# EAGLE board Solar USB (EAGLE 7.1.0)
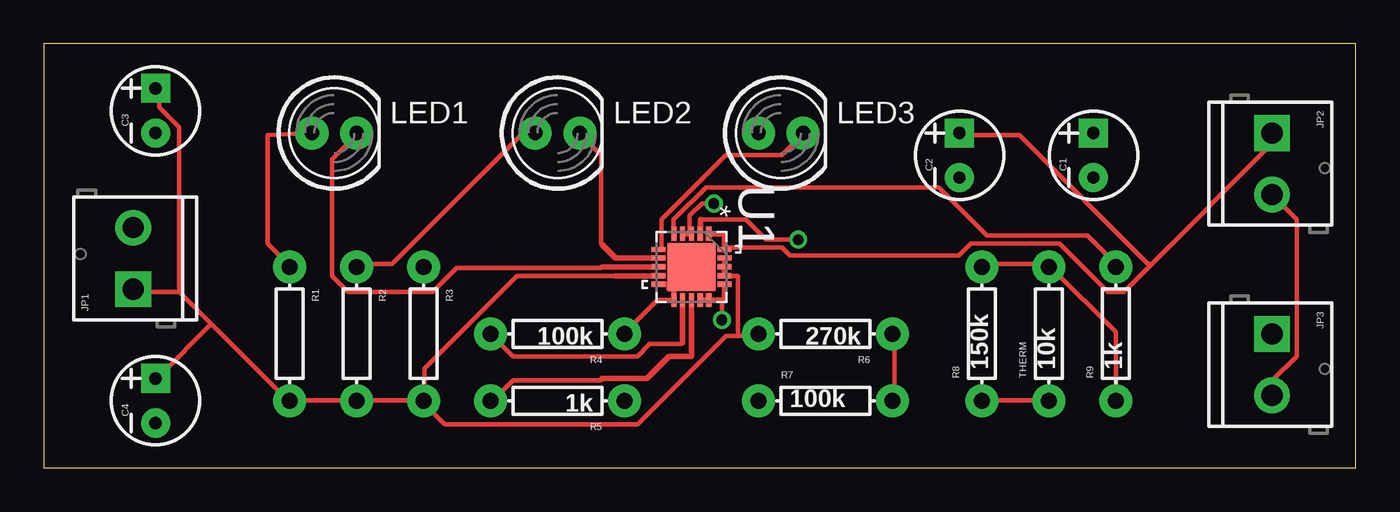
[diagram p0: board, top side]
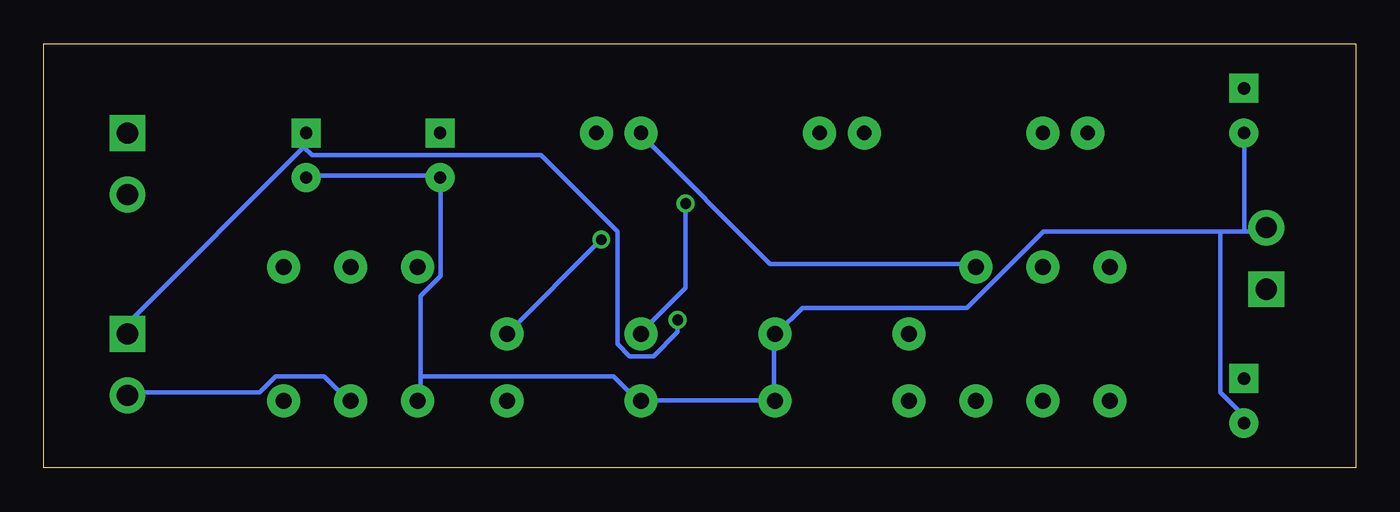
[diagram p1: board, bottom side, seen from below]

Size 74.6 x 24.12 mm. Coordinates in mm from the lower left corner, seen from the top.
Outline: 0,0 74.6,0 74.6,24.12 0,24.12 0,0
Copper layers (1*16): Top 0.035mm / dielectric 1.5mm / Bottom 0.035mm
Design rules "default": minimum track width 10mil, minimum drill 24mil, track to track 8mil, track to pad 8mil, pad to pad 8mil, via to via 8mil, smd to smd 8mil, copper to edge 40mil, drill to drill 8mil, minimum pad ring 10mil, minimum via ring 8mil, stop-mask expansion 4mil, vias tented up to drill 0mil, thermal gap 10mil

## Footprints (pad centres in the part's own frame; a part is rotated, then mirrored left to right if it is on the bottom)
CPOL-RADIAL-10UF-25V-KIT = drill 0.7 pad 1.651 square: 1 1.27,0 | drill 0.7 pad 1.651: 2 -1.27,0
SCREWTERMINAL-3.5MM-2 = drill 1.2 pad 2.032 square: 1 0,0 | drill 1.2 pad 2.032: 2 3.5,0
LED5MM = drill 0.813 pad 1.88: A -1.27,0; K 1.27,0
AXIAL-0.3 = drill 0.9 pad 1.88: P$1 -3.81,0; P$2 3.81,0
QFN50P400X400X100-21N = smd 0.813 x 0.305: 1 -1.88,0.991; 2 -1.88,0.508; 3 -1.88,0; 4 -1.88,-0.508; 5 -1.88,-0.991; 11 1.88,-0.991; 12 1.88,-0.508; 13 1.88,0; 14 1.88,0.508; 15 1.88,0.991 | smd 0.305 x 0.813: 6 -0.991,-1.88; 7 -0.508,-1.88; 8 0,-1.88; 9 0.508,-1.88; 10 0.991,-1.88; 16 0.991,1.88; 17 0.508,1.88; 18 0,1.88; 19 -0.508,1.88; 20 -0.991,1.88 | smd 2.743 x 2.743: 21 0,0

## Placement (x,y rotation side)
C1  10uF  [CPOL-RADIAL-10UF-25V-KIT]  59.69,17.78 90 top
C2  10uF  [CPOL-RADIAL-10UF-25V-KIT]  52.07,17.78 90 top
C3  4700uF  [CPOL-RADIAL-10UF-25V-KIT]  6.35,20.32 90 top
C4  10uF  [CPOL-RADIAL-10UF-25V-KIT]  6.35,3.81 90 top
FRAME1  FRAME-LETTER  [CREATIVE_COMMONS]  21.59,-20.32 0 top  (outside the outline)
JP1  M023.5MM  [SCREWTERMINAL-3.5MM-2]  5.08,10.16 90 top
JP2  M023.5MM  [SCREWTERMINAL-3.5MM-2]  69.85,19.05 270 top
JP3  M023.5MM  [SCREWTERMINAL-3.5MM-2]  69.85,7.62 270 top
LED1  [LED5MM]  16.51,19.05 0 top
LED2  [LED5MM]  29.21,19.05 0 top
LED3  [LED5MM]  41.91,19.05 0 top
R1  [AXIAL-0.3]  13.97,7.62 270 top
R2  [AXIAL-0.3]  17.78,7.62 270 top
R3  [AXIAL-0.3]  21.59,7.62 270 top
R4  100k  [AXIAL-0.3]  29.21,7.62 180 top
R5  1k  [AXIAL-0.3]  29.21,3.81 180 top
R6  270k  [AXIAL-0.3]  44.45,7.62 180 top
R7  100k  [AXIAL-0.3]  44.45,3.81 0 top
R8  150k  [AXIAL-0.3]  53.34,7.62 90 top
R9  1k  [AXIAL-0.3]  60.96,7.62 90 top
THERM  10k  [AXIAL-0.3]  57.15,7.62 90 top
U1  MCP73871-2CCI/ML  [QFN50P400X400X100-21N]  36.83,11.43 270 top

## Library data of the parts
C1-C4 = SparkFun-Capacitors; PROD_ID: CAP-08440
FRAME1 = SparkFun-Aesthetics
JP1-JP3 = SparkFun-Connectors
LED1-LED3 = SparkFun-LED
R1-R9 THERM = SparkFun-Resistors; PROD_ID: RES-08380; VALE: 1k
U1 = Microchip_By_element14_Batch_1; MPN: MCP73871; OC_FARNELL: 1642489; OC_NEWARK: 54M4957; PACKAGE: QFN-20; SUPPLIER: Microchip

## Nets
N$1: R9.P$2 U1.5
N$2: C1.2 C2.2 C3.2 C4.2 JP1.2 JP2.2 JP3.2 R4.P$1 R5.P$1 R7.P$1 R8.P$1 THERM.P$1 U1.10 U1.11 U1.21
N$3: R4.P$2 U1.12
N$4: R5.P$2 U1.13
N$5: R8.P$2 R9.P$1 THERM.P$2
N$6: C1.1 JP3.1 U1.14 U1.15 U1.16
N$7: C2.1 JP2.1 U1.1 U1.20
N$8: LED3.K U1.6
N$9: LED2.K U1.7
N$10: C3.1 C4.1 JP1.1 R1.P$2 R2.P$2 R3.P$2 R6.P$2 U1.3 U1.4 U1.9 U1.17 U1.18 U1.19
N$11: LED1.K U1.8
N$12: LED1.A R1.P$1
N$13: LED2.A R2.P$1
N$14: LED3.A R3.P$1
N$16: R6.P$1 R7.P$2 U1.2

## Tracks (layer width: path | path; a pad name or v marks a point on that pad's centre or on a via)
N$1
  Top 0.254: U1.5 35.81,13.44 35.81,14.12 37.64,15.95 50.9,15.95 53.65,13.21 59.36,13.21 60.96,11.61 R9.P$2
N$2
  Top 0.254: JP3.2 69.88,4.29 69.88,4.98 71.25,6.35 71.25,14.12 69.88,15.49 JP2.2 | R8.P$1 53.42,3.83 57.07,3.83 THERM.P$1 | U1.11 34.9,9.55 33.07,7.72 R4.P$1
  Top 0.305: U1.11 35.84,10.16 35.56,10.16 35.56,10.44 | 35.56,10.44 U1.10 | U1.21 36.83,10.44 35.56,10.44
  Bottom 0.254: C1.2 59.59,16.64 52.27,16.64 C2.2 52.05,16.41 52.05,10.92 53.19,9.78 53.19,5.21 | 53.19,5.21 53.19,3.83 R8.P$1 | JP3.2 69.65,4.29 62.33,4.29 61.42,5.21 58.67,5.21 57.3,3.83 THERM.P$1 | 33.07,3.83 33.07,7.49 R4.P$1 32.84,7.72 31.47,9.09 22.1,9.09 17.75,13.44 7.7,13.44 | 33.07,3.83 40.62,3.83 R7.P$1 40.84,3.83 42.22,5.21 53.19,5.21 | 33.07,3.83 R5.P$1 | 7.7,13.44 6.33,13.44 | 6.33,13.44 5.18,13.44 JP1.2 | 7.7,13.44 7.7,4.29 6.55,3.15 6.55,2.69 C4.2 | 6.33,13.44 6.33,18.92 C3.2
N$3
  Top 0.254: R4.P$2 26.67,6.35 33.76,6.35 34.44,7.04 36.27,7.04 36.32,7.11
  Top 0.305: U1.12 36.32,7.11
N$4
  Top 0.254: 31.75,5.08 31.7,4.98 26.67,4.98 25.53,3.83 R5.P$2
  Top 0.305: U1.13 36.83,6.35 35.56,6.35 34.29,5.08 31.75,5.08
N$5
  Top 0.254: R9.P$1 60.96,7.72 57.3,11.38 THERM.P$2 57.07,11.61 53.42,11.61 R8.P$2
N$6  (via drill 0.61)
  Top 0.254: v38.56,8.41 38.56,9.55
  Top 0.305: U1.16 38.71,9.55 38.56,9.55 U1.15 U1.14
  Bottom 0.254: 59.82,18.24 59.82,18.92 C1.1 59.82,18.24 | 59.82,18.24 69.65,8.41 69.65,7.72 JP3.1 | v38.56,8.41 38.56,7.72 39.93,6.35 41.3,6.35 41.99,7.04 41.99,13.44 46.33,17.78 59.36,17.78 59.82,18.24
N$7
  Top 0.254: 63.02,11.61 69.65,18.24 69.65,18.92 JP2.1 | 63.02,11.61 61.42,10.01 60.5,10.01 57.76,12.75 52.73,12.75 52.05,12.06 42.44,12.06 41.99,12.52 38.79,12.52 U1.20 | 63.02,11.61 62.79,11.61 55.47,18.92 52.27,18.92 C2.1
  Top 0.305: U1.1 38.71,13.31 U1.20
N$8
  Top 0.254: U1.6 35.13,12.52 35.13,14.12 38.79,17.78 41.99,17.78 43.13,18.92 LED3.K
N$9
  Top 0.254: 31.75,12.7 31.7,12.75 31.7,17.78 30.56,18.92 LED2.K
  Top 0.305: U1.7 32.51,11.94 31.75,12.7
N$10  (via drill 0.61)
  Top 0.254: 7.7,10.01 5.18,10.01 JP1.1 | 9.53,8.18 13.87,3.83 R1.P$2 14.1,3.83 17.75,3.83 R2.P$2 17.98,3.83 21.41,3.83 R3.P$2 | 9.53,8.18 7.7,10.01 | R3.P$2 21.64,3.83 21.64,5.66 26.9,10.92 32.51,10.92 | 39.47,7.49 38.79,7.49 33.76,2.46 22.78,2.46 21.64,3.61 R3.P$2 | 39.47,7.49 40.62,7.49 R6.P$2 | 9.53,8.18 6.55,5.21 C4.1 | 7.7,10.01 7.7,19.38 6.55,20.52 6.55,21.44 C3.1 | v38.1,15.04 37.41,15.04 36.73,14.35 36.73,13.44 U1.3 | U1.17 39.47,10.92 39.47,7.49
  Top 0.305: U1.17 U1.18 U1.19 | U1.4 U1.3 | U1.9 32.51,10.92
  Bottom 0.254: v38.1,15.04 38.1,10.24 40.62,7.72 R6.P$2
N$11
  Top 0.254: 31.75,11.43 31.7,11.38 23.47,11.38 22.1,10.01 17.3,10.01 16.38,10.92 16.38,17.55 17.75,18.92 LED1.K
  Top 0.305: U1.8 31.75,11.43
N$12
  Top 0.254: LED1.A 12.72,18.92 12.72,12.75 13.87,11.61 R1.P$1
N$13
  Top 0.254: R2.P$1 17.98,11.61 19.81,11.61 27.13,18.92 27.81,18.92 LED2.A
N$14
  Bottom 0.254: R3.P$1 21.64,11.61 33.3,11.61 40.62,18.92 LED3.A
N$16  (via drill 0.61)
  Top 0.254: 37.34,14.12 39.93,14.12 41.07,12.98 v42.9,12.98 | R7.P$2 48.39,3.83 48.39,7.49 R6.P$1
  Top 0.305: U1.2 37.34,14.12
  Bottom 0.254: R6.P$1 v42.9,12.98